# Altium PCB sensor_V1.1.PcbDoc
Units mil, origin at the board's own origin, x right, y up, seen from the top; angles counter-clockwise.
Board outline 1304.24 x 1068.02 mil, 2 copper layers (Top Layer, Bottom Layer); 67 components, 56 nets, 233 pads, 68 vias.
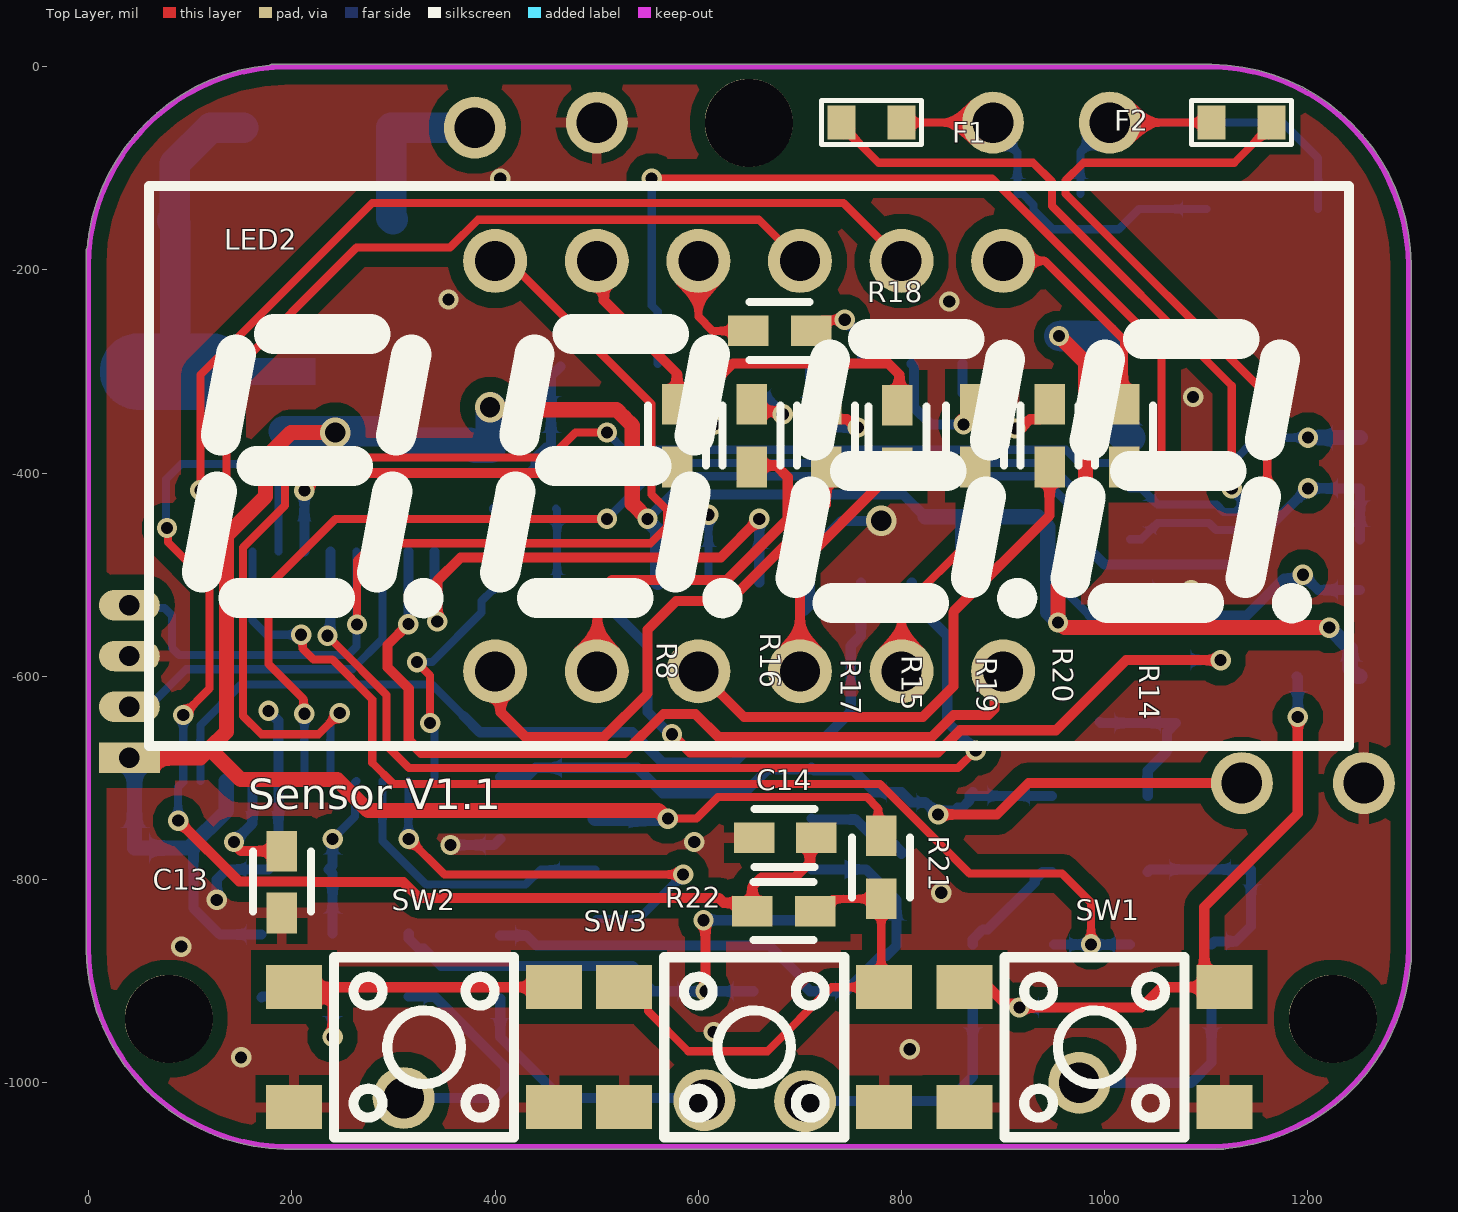
[diagram p0: Top Layer view]
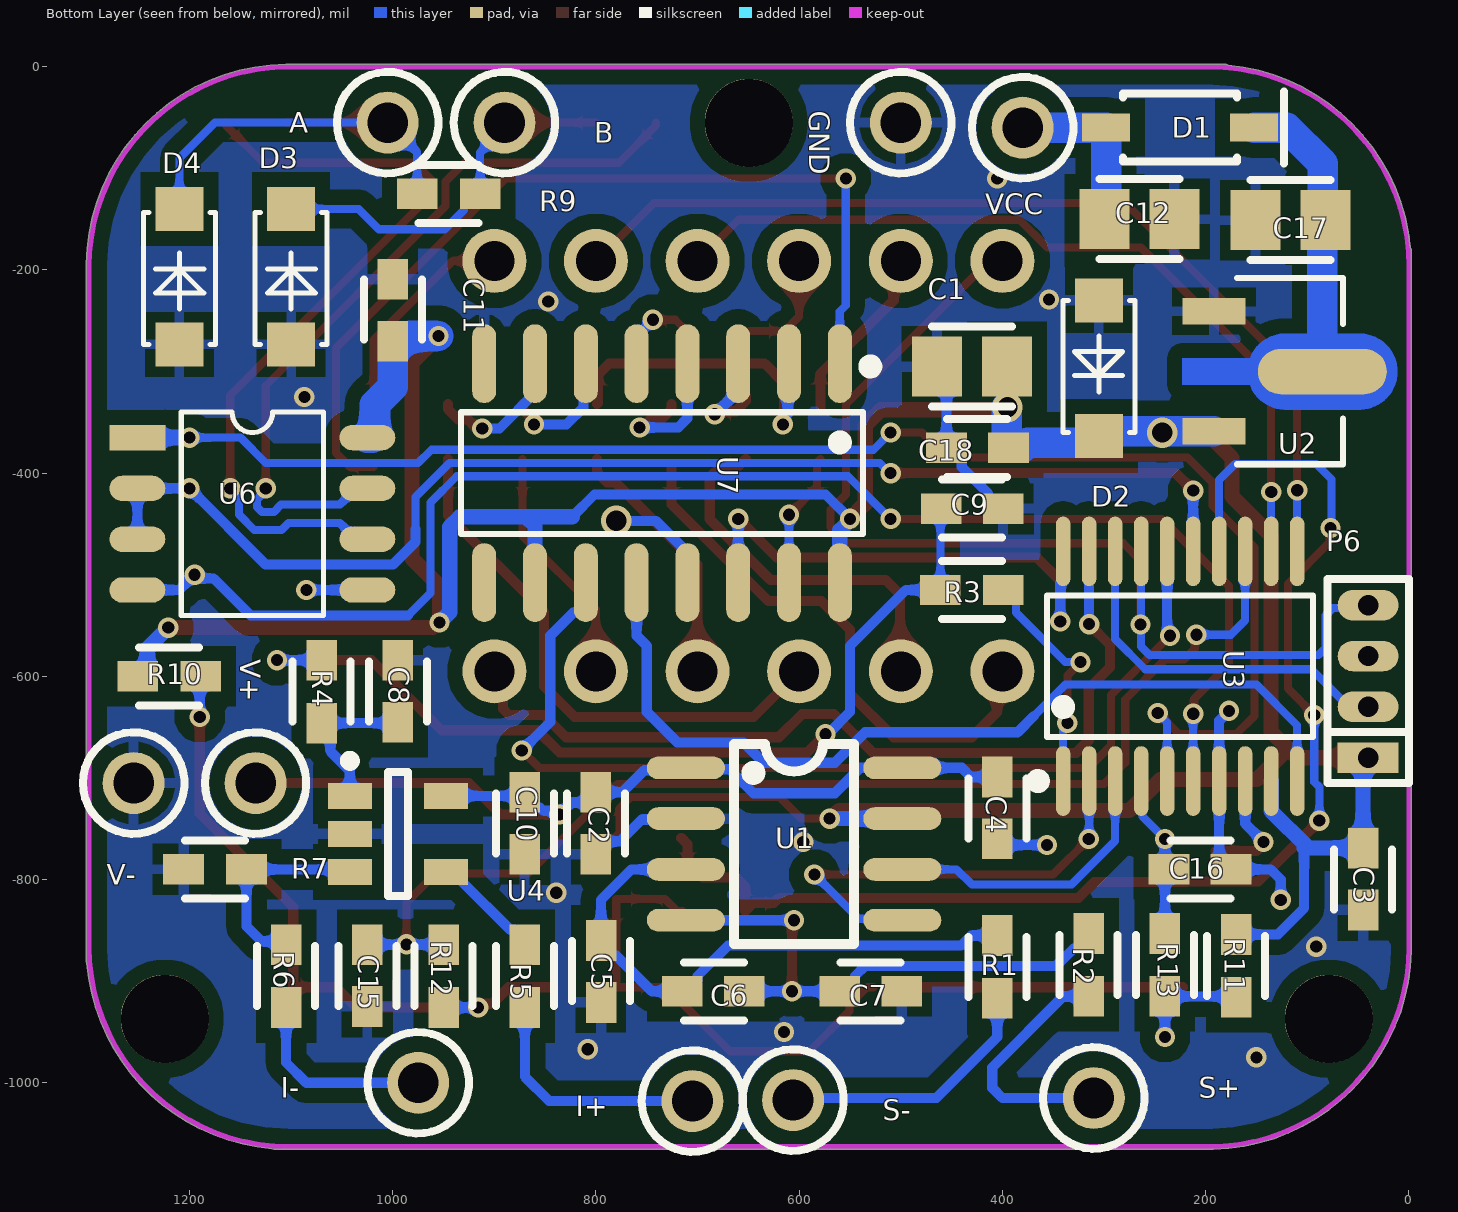
[diagram p1: Bottom Layer view, seen from below]
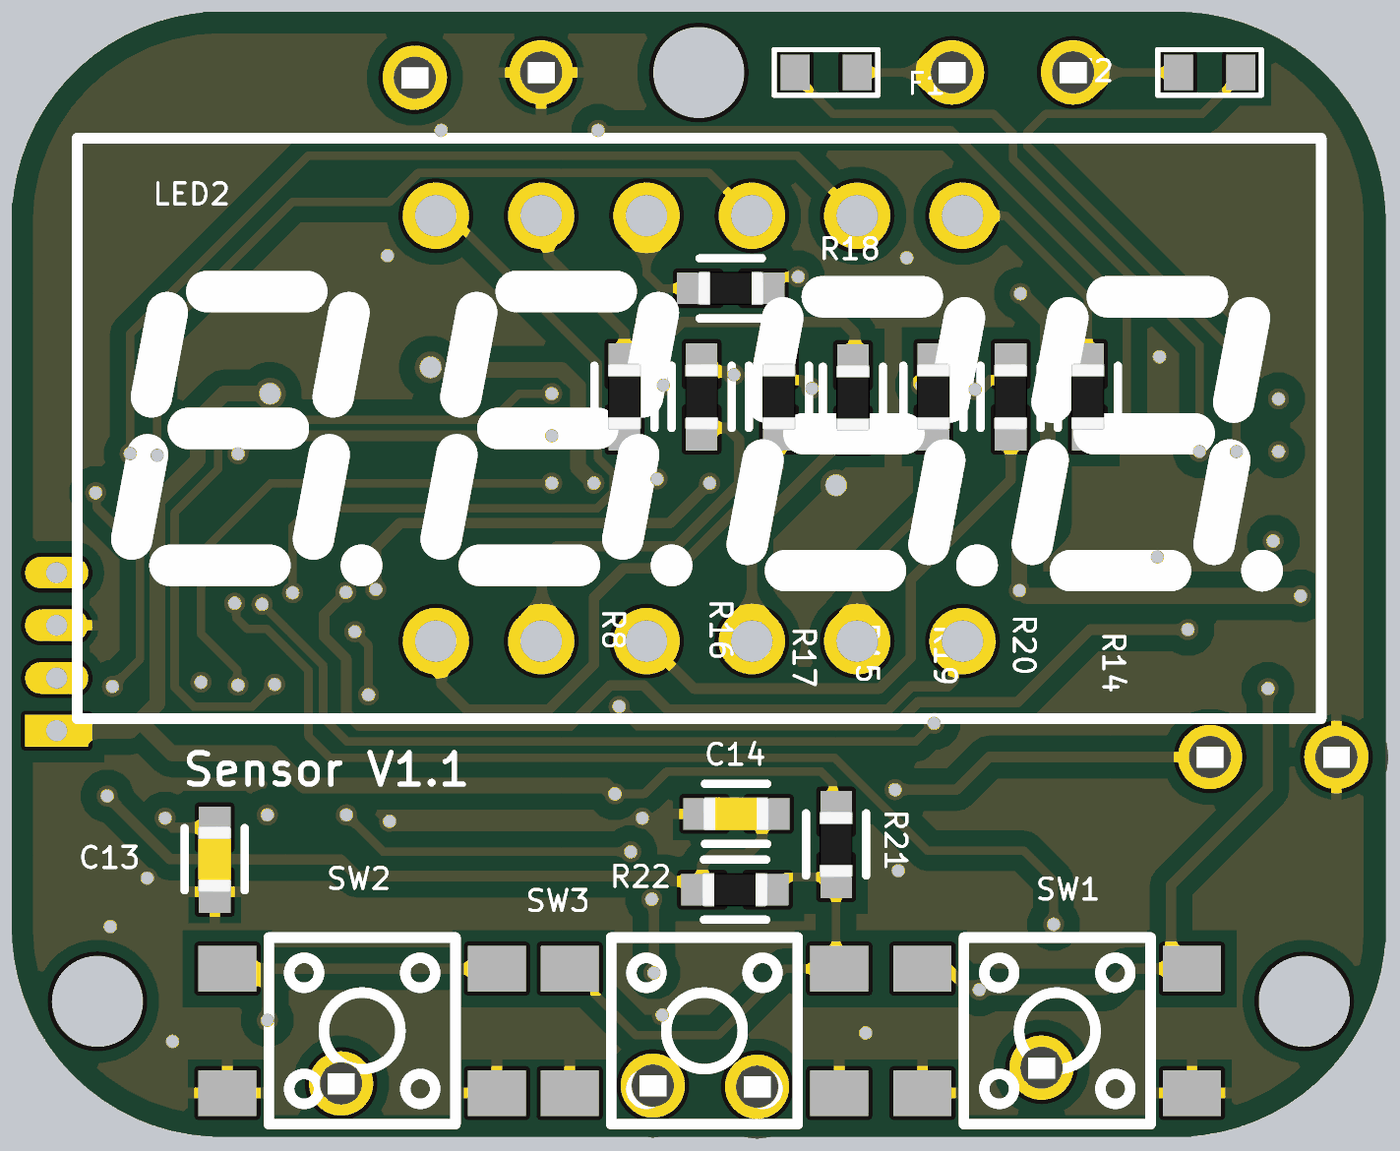
[diagram p2: 3D render of the assembled board from above, using the file's embedded part models]
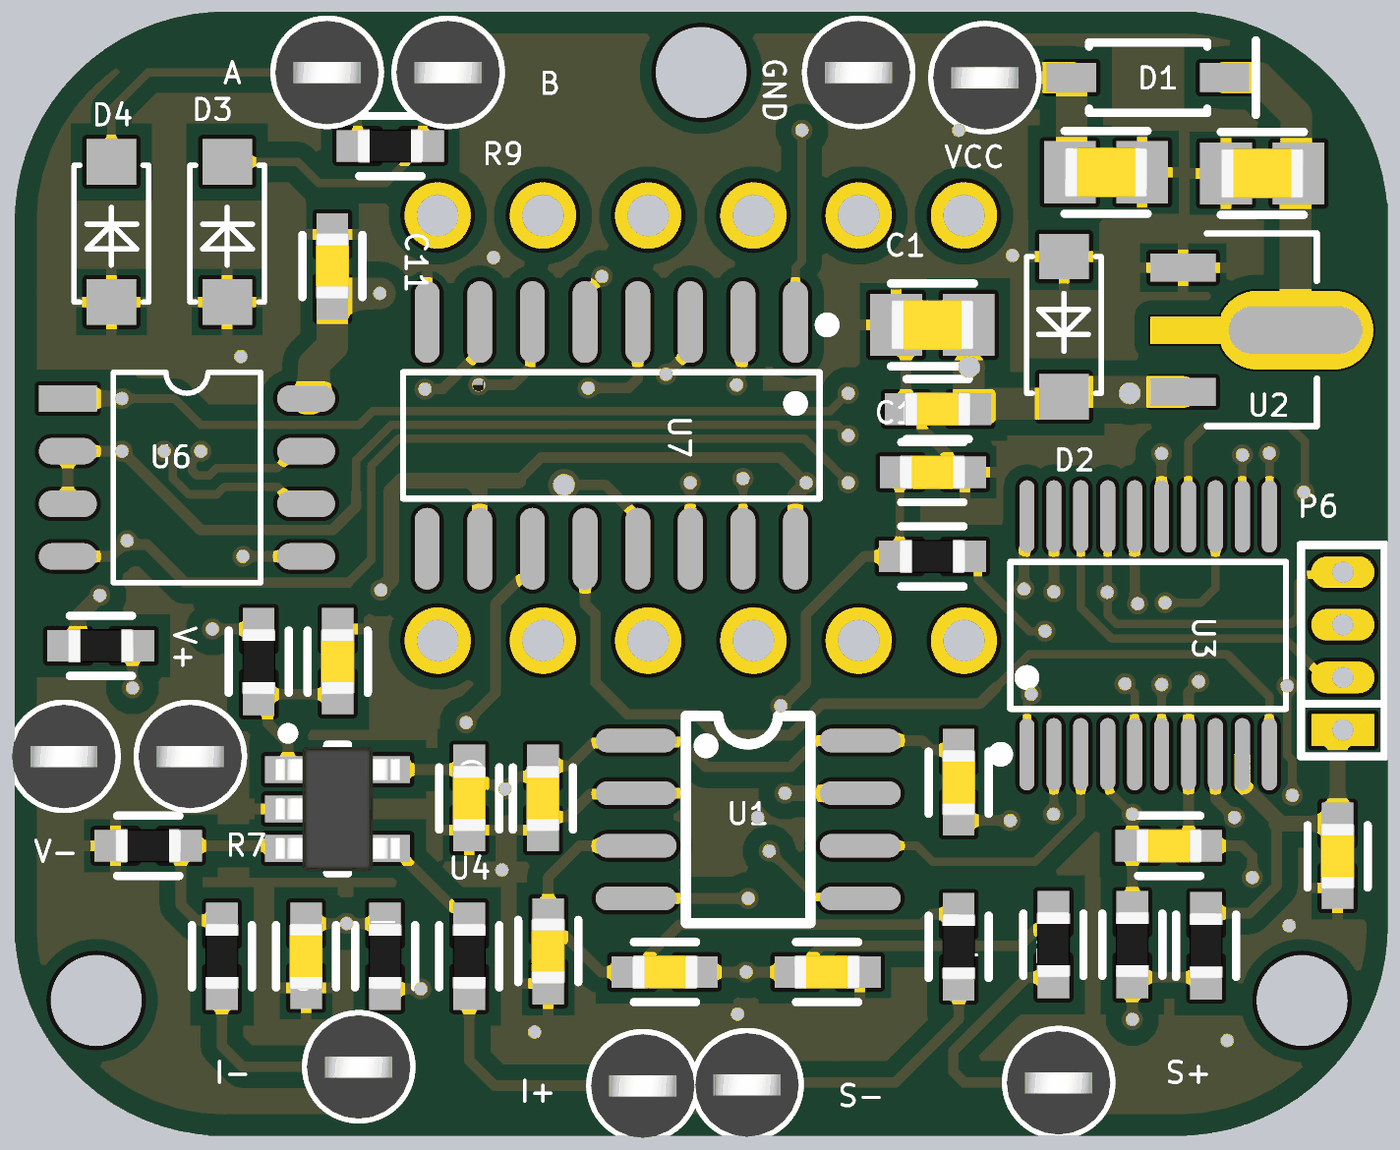
[diagram p3: 3D render of the assembled board from below, using the file's embedded part models]

## Layer stack, top to bottom
Top Solder: solder mask 0.4, Solder Resist, Dk 3.5
Top Layer: signal copper 1.4
Dielectric 1: dielectric 12.6, FR-4, Dk 4.8
Bottom Layer: signal copper 1.4
Bottom Solder: solder mask 0.4, Solder Resist, Dk 3.5

## Board outline
-2.52,-870 -2.52,-180 -1.63,-178.08 cw(c196.85,-196.85) 178.08,1.63 180,2.51 1105,2.51 1105.33,2.49 cw(c1102.36,-196.85) 1301.71,-193.88 1301.73,-194.21 1301.73,-880.79 1301.06,-882.5 cw(c1102.36,-866.14) 1118.72,-1064.84 1117.01,-1065.51 192.99,-1065.51 192.51,-1065.46 cw(c196.85,-866.14)

## Design rules (kind name [scope] priority, off if disabled: settings)
Clearance Clearance_1 [InPolygon] p1: gap=15 ignorepadtopadclearanceinfootprint=FALSE
Clearance [All] p2: gap=5 ignorepadtopadclearanceinfootprint=FALSE
DiffPairsRouting [All] p1: maxlimit=10 minlimit=8 mostfreqgap=10 toplayer_minwidth=8 toplayer_maxwidth=15 toplayer_prefwidth=8 bottomlayer_minwidth=8 bottomlayer_maxwidth=15 bottomlayer_prefwidth=8 maxuncoupledlength=500
PolygonConnect PolygonConnect_1 [isvia] p1: connectstyle=Direct reliefconductorwidth=10 reliefentries=4 polygonreliefangle="90 Angle" airgapwidth=10
PolygonConnect [All] p2: connectstyle=Relief reliefconductorwidth=10 reliefentries=4 polygonreliefangle="90 Angle" airgapwidth=10
RoutingVias [All] p1: holewidth=28 width=50 viastyle="Through Hole" minholewidth=28 minwidth=50 maxholewidth=28 maxwidth=50
SilkToSolderMaskClearance [IsPad] p1: minsilkscreentomaskgap=4 clearancetoexposedcopper=TRUE
SolderMaskExpansion [All] p1: expansion=4 istentingtop=FALSE
Width [All] p1: maxlimit=200 minlimit=5 preferedwidth=8
28 further rules are at their usual default settings.

## Classes and differential pairs
component class display: C18 LED2 R8 R14 R15 R16 R17 R18 R19 R20 U7
component class rs485: A B C11 D3 D4 F1 F2 R9 U6
component class mcu: C13 C14 C15 C16 P6 R10 R11 R12 R13 R21 R22 SW1 SW2 SW3 U3
component class constantCV: C1 C2 C3 C4 C5 C6 C7 C8 C9 C10 C12 C17 D1 D2 GND I+ I- R1 R2 R3 R4 R5 R6 R7 S+ S- U1 U2 U4 V+ V- VCC
differential pair 485: +485_P -485_N

## Components (designator, comment, footprint, x,y, rotation, side; value= is the part's Value field where it differs from the comment)
A "5001" KSTN-5001 1005,-55 r90 bottom
B "5001" KSTN-5001 890,-55 r90 bottom
C1 "Capacitor_0805" CAPC2012X127N_0805 430,-295 r0 bottom value=47u/10V
C2 "Capacitor_0603" CAPC1608X092N_0603 800,-745 r270 bottom value=0.1u
C3 "Capacitor_0603" CAPC1608X092N_0603 45,-800 r270 bottom value=0.1u
C4 "Capacitor_0603" CAPC1608X092N_0603 405,-730 r270 bottom value=0.1u
C5 "Capacitor_0603" CAPC1608X092N_0603 795,-890 r90 bottom value=0.1u
C6 "Capacitor_0603" CAPC1608X092N_0603 684.02,-910 r180 bottom value=0.1u
C7 "Capacitor_0603" CAPC1608X092N_0603 530,-910 r0 bottom value=0.1u
C8 "Capacitor_0603" CAPC1608X092N_0603 995,-615 r270 bottom value=0.1u
C9 "Capacitor_0603" CAPC1608X092N_0603 430,-435 r0 bottom value=0.1u
C10 "Capacitor_0603" CAPC1608X092N_0603 870,-745 r270 bottom value=0.1u
C11 "Capacitor_0603" CAPC1608X092N_0603 1000,-239.02 r90 bottom value=0.1u
C12 "22u/35V" CAPC2012X127N_0805 265,-150 r180 bottom
C13 "Capacitor_0603" CAPC1608X092N_0603 190,-802 r90 top value=470nF/50V
C14 "Capacitor_0603" CAPC1608X092N_0603 685,-759 r180 top value=0.1u
C15 "Capacitor_0603" CAPC1608X092N_0603 1025,-895 r270 bottom value=0.1u
C16 "Capacitor_0603" CAPC1608X092N_0603 205,-790 r180 bottom value=0.1u
C17 "22u/35V" CAPC2012X127N_0805 116.55,-151 r0 bottom
C18 "Capacitor_0603" CAPC1608X092N_0603 425,-375 r0 bottom value=0.1u
D1 "1N5819HW-7-F" DIOD-SOD-123-2_V 225,-60 r180 bottom
D2 "SMF5.0A" SOD123 305,-230 r270 bottom value=SMBJ6.5A
D3 "SMF6.5CA" SOD123 1100,-273.27 r90 bottom value=SMBJ6.5A
D4 "SMF6.5CA" SOD123 1210,-273.27 r90 bottom value=SMBJ6.5A
F1 "BSMD0603-010-33V" 0603R 800,-55 r180 top
F2 "BSMD0603-010-33V" 0603R 1105,-55 r0 top
GND "5001" KSTN-5001 500,-55 r90 bottom
I+ "5001" KSTN-5001 705,-1018 r90 bottom
I- "5001" KSTN-5001 975,-1000 r90 bottom
LED2 "FJ5461AH 红色" LED-SEG-TH_12P-L30.0-W14.0-P2.54-S10.26-BL 650,-393.03 r0 top locked
P6 "Header 4" 1.27-4P 40,-680 r90 bottom
R1 "1K/1%" RESC1608X055N_0603 405,-885.98 r270 bottom
R2 "1K/1%" RESC1608X055N_0603 315,-884.02 r270 bottom
R3 "1K/1%" RESC1608X055N_0603 430,-515 r180 bottom value=51K/1%
R4 "1K/1%" RESC1608X055N_0603 1070,-615 r90 bottom value=51K/1%
R5 "51/1%" RESC1608X055N_0603 870,-895 r90 bottom
R6 "51/1%" RESC1608X055N_0603 1105,-895 r270 bottom
R7 "1K/1%" RESC1608X055N_0603 1175,-790 r0 bottom
R8 "510" RESC1608X055N_0603 579,-363 r270 top
R9 "120" RESC1608X055N_0603 945,-125 r0 bottom
R10 "10K" RESC1608X055N_0603 1220,-600 r180 bottom
R11 "10K" RESC1608X055N_0603 170,-885 r270 bottom
R12 "1K/1%" RESC1608X055N_0603 950,-895 r90 bottom value=1K
R13 "1K/1%" RESC1608X055N_0603 240,-884.02 r90 bottom value=1K
R14 "510" RESC1608X055N_0603 1019,-363 r270 top
R15 "510" RESC1608X055N_0603 796,-364 r90 top
R16 "510" RESC1608X055N_0603 652.33,-363 r90 top
R17 "510" RESC1608X055N_0603 725.67,-363 r90 top
R18 "510" RESC1608X055N_0603 680,-260 r0 top
R19 "510" RESC1608X055N_0603 872.33,-363 r90 top
R20 "510" RESC1608X055N_0603 945.67,-363 r90 top
R21 "10K" RESC1608X055N_0603 780,-788 r270 top
R22 "1K/1%" RESC1608X055N_0603 684,-831 r180 top value=1K
S+ "5001" KSTN-5001 310,-1015 r90 bottom
S- "5001" KSTN-5001 606,-1017 r90 bottom
SW1 "KH-4.5X4.5X7H-STM" SW-SMD_4P-L4.5-W4.5-P3.00-LS6.8 990,-965 r180 top locked
SW2 "KH-4.5X4.5X7H-STM" SW-SMD_4P-L4.5-W4.5-P3.00-LS6.8 330,-965 r180 top locked
SW3 "KH-4.5X4.5X7H-STM" SW-SMD_4P-L4.5-W4.5-P3.00-LS6.8 655,-965 r180 top locked
U1 "CS1237-SOP8" SOIC-8_L5.0-W4.0-P1.27-LS6.0-BL 605,-765 r270 bottom
U2 "HT7550-1" SOT-89_L4.5-W2.5-P1.50-LS4.2-BR 138.4,-299.66 r0 bottom
U3 "CW32L010F8P6" TSSOP-20_L6.5-W4.4-P0.65-LS6.4-BL 225,-590 r180 bottom
U4 "RS321BK" SHBL-SOT-23-5_N 995,-755 r180 bottom
U6 "SIT3088" so-8 1251.38,-365 r180 bottom
U7 "74HC595D" SOIC-16_L9.9-W3.9-P1.27-LS6.0-BL 735,-400 r0 bottom
V+ "5001" KSTN-5001 1135,-705 r90 bottom
V- "5001" KSTN-5001 1255,-705 r90 bottom
VCC "5001" KSTN-5001 380,-60 r90 bottom

## Footprints (in the part's own frame and the unit in brackets; to place one, negate y for a bottom-side part, rotate by r counter-clockwise, add the part's x,y. Pads: shape width x height; smd on the part's side, far side on the other; paste and mask are expansions set on the pad)
1.27-4P [mil]
  rect 30x60 hole 20: 1(0,0)
  oval 30x60 hole 20: 2(50,0) 3(100,0) 4(150,0)
  silkscreen extent -25,-40 176,40
0603R [mm]
  rect 0.7x0.85 smd: 1(0,0) 2(1.5,0)
  silkscreen extent -0.5,-0.55 2,0.55
CAPC1608X092N_0603 [mil] "Chip Capacitor, 0603"
  round 10 on Mech3: 0(0,0)
  rect 40x30 smd: 1(-30.98,0) 2(30,0)
  silkscreen extent -30,-29 30,29, body extent -31,-16 31,16, height 36
CAPC2012X127N_0805 [mm] "Chip Capacitor, 0805"
  round 0.254 on Mech3: 0(0,0)
  rect 1.25x1.5 smd: 1(-0.875,0) 2(0.875,0)
  silkscreen extent -1,-1 1,1, body extent -1,-0.6 1,0.6, height 1.27
DIOD-SOD-123-2_V [mm] "SOD-123, 2-Leads, Body 2.85x1.7mm (max), Pitch 3.7mm"
  rect 1.2x0.7 smd: 1(-1.85,0) 2(1.85,0)
  silkscreen extent -1.43,-0.9 2.6,0.9, body extent -1.42,-0.85 1.43,0.85, height 1.45
KSTN-5001 [mm] "Test Point, Through Hole, Dia 2.54mm"
  round 1.55 hole 1.016: 1(0,0)
  silkscreen extent -1.27,-1.27 1.27,1.27, body extent -1.25,-1.24 1.25,1.24, height 4.62
LED-SEG-TH_12P-L30.0-W14.0-P2.54-S10.26-BL [mm]
  round 1.6 hole 1: 1(-6.35,-5.13) 2(-3.81,-5.13) 3(-1.27,-5.13) 4(1.27,-5.13) 5(3.81,-5.13) 6(6.35,-5.13) 7(6.35,5.13) 8(3.81,5.13) 9(1.27,5.13) 10(-1.27,5.13) 11(-3.81,5.13) 12(-6.35,5.13)
  silkscreen extent -15,-7 15,7
RESC1608X055N_0603 [mil] "Chip Resistor, 0603"
  round 10 on Mech3: 0(0,0)
  rect 40x30 smd: 1(-30.98,0) 2(30.98,0)
  silkscreen extent -30,-29 30,29, body extent -31,-16 31,16, height 22
SHBL-SOT-23-5_N [mm] "SOT23, 5-Leads, Body 2.9x1.6mm, Pitch 0.95mm, Lead Span 2.8mm, IPC Medium Density"
  rect 1.1x0.65 smd: 1(-1.2,0.95) 2(-1.2,0) 3(-1.2,-0.95) 4(1.2,-0.95) 5(1.2,0.95)
  silkscreen extent -1.33,-1.55 0.25,1.95, body extent -1.5,-1.5 1.5,1.5, height 1.45
so-8 [mil]
  rect 55x25 smd: 1(0,0)
  oval 55x25 smd: 2(0,-50) 3(0,-100) 4(0,-150) 5(226.38,-150) 6(226.38,-100) 7(226.38,-50) 8(226.38,0)
  silkscreen extent 43,-175 183,25
SOD123 [mm]
  rect 1.1x1.2 smd: 1(0,0) 2(3.385,0)
  silkscreen extent 0,-0.9 3.3,0.9
SOIC-8_L5.0-W4.0-P1.27-LS6.0-BL [mil]
  oval 22.38x76.78 smd: 1(-75,-106.5) 2(-25,-106.5) 3(25,-106.5) 4(75,-106.5) 5(75,106.5) 6(25,106.5) 7(-25,106.5) 8(-75,106.5)
  silkscreen extent -98,-59 98,59
SOIC-16_L9.9-W3.9-P1.27-LS6.0-BL [mil]
  oval 23.7x77.6 smd: 1(-175,-107.7) 2(-125,-107.7) 3(-75,-107.7) 4(-25,-107.7) 5(25,-107.7) 6(75,-107.7) 7(125,-107.7) 8(175,-107.7) 9(175,107.7) 10(125,107.7) 11(75,107.7) 12(25,107.7) 13(-25,107.7) 14(-75,107.7) 15(-125,107.7) 16(-175,107.7)
  silkscreen extent -211,-111 198,60
SOT-89_L4.5-W2.5-P1.50-LS4.2-BR [mm]
  rect 1.575x0.672 smd: 1(1.356,-1.5) 3(1.356,1.5)
  oval 3.226x1.14 smd: 2(-1.356,0.009)
  Top Layer region: -2.283,0.959 -0.429,0.959 -0.385,0.958 -0.34,0.955 -0.296,0.949 -0.252,0.942 -0.208,0.933 -0.165,0.921 -0.123,0.908 -0.081,0.893 -0.04,0.875 0,0.856 0.04,0.835 0.078,0.812 0.115,0.788 0.151,0.761 0.185,0.733 0.219,0.704 0.251,0.673 0.281,0.64 0.31,0.606 0.337,0.571 0.362,0.534 0.386,0.497 0.408,0.458 0.428,0.418 0.447,0.339 2.144,0.339 2.144,-0.321 0.447,-0.321 0.428,-0.401 0.408,-0.44 0.386,-0.479 0.362,-0.517 0.337,-0.553 0.31,-0.588 0.281,-0.622 0.251,-0.655 0.219,-0.686 0.185,-0.716 0.151,-0.744 0.115,-0.77 0.078,-0.795 0.04,-0.818 0,-0.839 -0.04,-0.858 -0.081,-0.875 -0.123,-0.89 -0.165,-0.904 -0.208,-0.915 -0.252,-0.925 -0.296,-0.932 -0.34,-0.937 -0.385,-0.94 -0.429,-0.941 -2.283,-0.941 -2.328,-0.94 -2.372,-0.937 -2.416,-0.932 -2.46,-0.925 -2.504,-0.915 -2.547,-0.904 -2.589,-0.89 -2.631,-0.875 -2.672,-0.858 -2.713,-0.839 -2.752,-0.818 -2.79,-0.795 -2.827,-0.77 -2.863,-0.744 -2.898,-0.716 -2.931,-0.686 -2.963,-0.655 -2.993,-0.622 -3.022,-0.588 -3.049,-0.553 -3.075,-0.517 -3.098,-0.479 -3.12,-0.44 -3.141,-0.401 -3.159,-0.36 -3.175,-0.318 -3.189,-0.276 -3.202,-0.233 -3.212,-0.19 -3.22,-0.146 -3.227,-0.102 -3.231,-0.058 -3.233,-0.013 -3.233,0.031 -3.231,0.076 -3.227,0.12 -3.22,0.164 -3.212,0.208 -3.202,0.251 -3.189,0.294 -3.175,0.336 -3.159,0.377 -3.141,0.418 -3.12,0.458 -3.098,0.497 -3.075,0.534 -3.049,0.571 -3.022,0.606 -2.993,0.64 -2.963,0.673 -2.931,0.704 -2.898,0.733 -2.863,0.761 -2.827,0.788 -2.79,0.812 -2.752,0.835 -2.713,0.856 -2.672,0.875 -2.631,0.893 -2.589,0.908 -2.547,0.921 -2.504,0.933 -2.46,0.942 -2.416,0.949 -2.372,0.955 -2.328,0.958 -2.283,0.959
  silkscreen extent -1.87,-2.33 0.78,2.33
SW-SMD_4P-L4.5-W4.5-P3.00-LS6.8 [mm]
  rect 1.4x1.1 smd: 1(-3.25,1.5) 2(3.25,1.5) 3(-3.25,-1.5) 4(3.25,-1.5)
  silkscreen extent -2.25,-2.25 2.25,2.25
TSSOP-20_L6.5-W4.4-P0.65-LS6.4-BL [mil]
  oval 14.33x68.58 smd: 1(-115.16,-113.03) 2(-89.57,-113.03) 3(-63.98,-113.03) 4(-38.39,-113.03) 5(-12.79,-113.03) 6(12.8,-113.03) 7(38.39,-113.03) 8(63.98,-113.03) 9(89.57,-113.03) 10(115.16,-113.03) 11(115.16,113.03) 12(89.57,113.03) 13(63.98,113.03) 14(38.39,113.03) 15(12.8,113.03) 16(-12.79,113.03) 17(-38.39,113.03) 18(-63.98,113.03) 19(-89.57,113.03) 20(-115.16,113.03)
  silkscreen extent -146,-119 131,70

## Part data
A B GND I+ I- S+ S- V+ V- VCC: "Test Point, Black, 1-Pin THD, RoHS, Bulk", Manufacturer=Keystone
C1: "Capacitor, MLCC", Manufacturer=KEMET, Package=0805, PartNumber=C0805C106K8PACTU, TempCo=[tempco], Tolerance=[tol], Voltage Rating=[voltage], ComponentLink1Description=Datasheet, SupplierDescription="CAP CER 10UF 10V X5R 0805"
C2 C3 C4 C5 C6 C7 C8 C9 C10 C11 C13 C14 C15 C16 C18: "Capacitor, MLCC", Manufacturer=KEMET, Package=0603, PartNumber=C0603C104M5RACTU, TempCo=[tempco], Tolerance=[tol], Voltage Rating=[voltage], ComponentLink1Description=Datasheet, SupplierDescription="CAP CER 0.1UF 50V X7R 0603"
C12 C17: library part Capacitor_0805, "Capacitor, MLCC", Manufacturer=KEMET, Package=0805, PartNumber=C0805C106K8PACTU, TempCo=[tempco], Tolerance=[tol], Voltage Rating=[voltage], ComponentLink1Description=Datasheet, SupplierDescription="CAP CER 10UF 10V X5R 0805"
D1: Maximum Reverse Current IR (uA)=50, Operating and Storage Temperature Range="-65 to 125 degC", Peak Forward Surge Current IFSM (A)=25, Peak Repetitive Reverse Voltage VRRM (V)=40, Mounting Technology="Surface Mount", PackageDescription="2-Pin SOD-123, Body 2.7 x 1.55 mm, Pitch 3.7 mm", PackageReference=SOD-123-2, Packing="Tape and Reel", PartNumber=1N5819HW-7-F, RoHS=TRUE, Total Capacitance CT (pF)=50, VR (RMS) (V)=28
D2 D3 D4: library part "DIODE S"
F1 F2: library part RES2
LED2: JLCPCB Part Class="Extended Part", LCSC Part Name="4位0.56英寸红色数码管 共阴极", Luminous Color=红色, Manufacturer=志浩, Power Dissipation=-, Add into BOM=yes, Convert to PCB=yes, Datasheet=https://atta.szlcsc.com/upload/public/pdf/source/20151111/1457707576636.pdf, Device="FJ5461AH 红色", Digit/Alpha Size(inch)=0.56, Display Type=7段, LED Polarity=共阴极, Manufacturer Part="FJ5461AH 红色", Module Size=-, Number of Characters=4位, Supplier=LCSC, Supplier Footprint=插件, Supplier Part=C54396, Symbol="FJ5461AH red"
R1 R2 R3 R4 R5 R6 R7 R8 R9 R10 R11 R12 R13 R14 R15 R16 R17 R18 R19 R20 R21 R22: library part Resistor_0603, "Resistor, Standard", Manufacturer=Yageo, Package=0603, PartNumber=RC0603FR-1075KL, Power Rating=[power], TempCo=[tempco], Tolerance=tol, ComponentLink1Description=Datasheet, SupplierDescription="RES SMD 75K OHM 1% 1/10W 0603"
SW1 SW2 SW3: library part J1L0503110, "Tactile Switch, 6 × 6 mm, Height 5.0mm, 4-Pin THD", Max Operating Temperature="70 degC", Min Operating Temperature="-25 degC", PartNumber=J1L0503110
U1: JLCPCB Part Class="Extended Part", LCSC Part Name="1通道 24位ADC SPI接口", Manufacturer=CHIPSEA(芯海科技), Add into BOM=yes, Convert to PCB=yes, Datasheet=https://atta.szlcsc.com/upload/public/pdf/source/20160706/1467801115662.pdf, Device=CS1237-SOP8, Manufacturer Part=CS1237-SOP8, Supplier=LCSC, Supplier Footprint=SOP-8-150mil, Supplier Part=C77801, Symbol=CS1237-SO
U2: library part HT7550-1_C347189, Dropout Voltage=100mV@(1mA), JLCPCB Part Class="Extended Part", LCSC Part Name="输入30V 输出5V 100mA", Manufacturer=UMW(友台半导体), Maximum Input Voltage=30V, Operating Temperature=-25℃~+70℃, Output Current=100mA, Output Voltage=5V, Power Supply Rejection Ratio (PSRR)=-, standby current=3uA, Add into BOM=yes, Convert to PCB=yes, Datasheet=https://atta.szlcsc.com/upload/public/pdf/source/20241210/442D8F583BE08BBCCA568BF38D964031.pdf, Device=HT7550-1_C347189, Manufacturer Part=HT7550-1, Noise=-, Number of Outputs=1, Output Polarity=正极, Output Type=固定, Supplier=LCSC, Supplier Footprint=SOT-89, Supplier Part=C347189, Symbol=HT7550-1_C347189
U3: LCSC Part Name=单片机（超低功耗MCU）CW32L010F8P6, Low-Voltage Detect=有, Manufacturer=CW(芯源), Operating Temperature Range=-40℃~+85℃, Operating Voltage Range=1.62V~5.5V, 16Bit Timer=6, 32Bit Timer=1, ADC (Bit)=12bit, Add into BOM=yes, CCP Capture/Compare=有, Convert to PCB=yes, CPU Core="ARM Cortex-M0+", CPU Maximum Speed=48MHz, Datasheet=https://atta.szlcsc.com/upload/public/pdf/source/20241016/B2F7E6511F33DFEE1FF291443365E705.pdf, Device=CW32L010F8P6, EEPROM=-, I2C=1, Infrared Data Association=有, Internal Comparator=2, Internal Oscillator=有, Manufacturer Part=CW32L010F8P6, Program Memory Type=FLASH, Program Storage Size=64KB, PWM (Bit)=16bit, RAM Size=4KB, Real-Time Clock=有, SPI=1, Supplier=LCSC, Supplier Footprint=TSSOP-20, Supplier Part=C41425332, Symbol=CW32L010F8P6, UART/USART=2, Watchdog=有
U4: library part BL321LFR, "1 MHz Rail-to-Rail IO Operational Amplifier, Single Channel, -40 to 125 degC, 5-Pin SOT23, RoHS, Tape and Reel", Manufacturer="Shanghai Belling", Operating Temperature Range(C)="-40 to 150", Package Description="5-Pin Small Outline Transistor, Body 1.6 x 2.9 mm, Pitch 0.95 mm", Package Reference=SOT23-5, PartNumber=BL321LFR, Publisher="Bolgen Studio"
U6: library part SN65HVD06D
U7: library part 74HC595
P6: Publisher="Altium Limited"

## Free pads (board coordinates)
  round 86.61 hole 86.61 unplated: 0(78.74,-937.01) 0(649.61,-55.12) 0(1224.41,-937.01)

## Via types
v1: diameter 20, hole 12, Top Layer to Bottom Layer, tented both sides, 65 vias
v2: diameter 30, hole 20, Top Layer to Bottom Layer, tented both sides, 3 vias

## Nets (pads, with @x,y where several pads share a name; then routed paths per layer and width w, separated by ;. In a path a pad name is that pad's centre, name@x,y a point inside that pad or via, vN(x,y) a via of type N, cw(c..) or ccw(c..) an arc to the next point about the centre after c; other vN are vias at no path point)
485_N: F1.2 U6.7 | length 750
  Top Layer w8: F1.2 740.94,-57.95 777.5,-94.51 929.51,-94.51 948.02,-113.02 948.02,-136.98 1125,-313.96 v1(1125,-415)
  Bottom Layer w8: U6.7 1036.02,-415 1052.02,-431 1109.89,-431 1116.94,-438.06 1128.81,-438.06 1133.5,-433.37 1133.5,-425.69 1125,-417.19 v1(1125,-415)
485_P: F2.2 U6.6 | length 784.8
  Top Layer w8: v1(1160,-415) 1160,-323.5 961.5,-125 961.5,-112.1 979.09,-94.51 1127.5,-94.51 1164.06,-57.95 F2.2
  Bottom Layer w8: U6.6 1036.02,-465 1052.02,-449 1102.43,-449 1109.49,-456.06 1136.27,-456.06 1151.5,-440.83 1151.5,-425.69 1160,-417.19 v1(1160,-415)
4856_N: B.1 D3.2 F1.1 R9.1 | length 381.6
  Top Layer w8: F1.1 B.1
  Bottom Layer w8: B.1 890,-60.46 914.02,-84.48 R9.1 919.02,-125 930.02,-136 930.02,-141 949.02,-160 1013.52,-160 1033.52,-140 D3.2
4856_P: A.1 D4.2 F2.1 R9.2 | length 451.5
  Top Layer w8: A.1 F2.1
  Bottom Layer w8: R9.2 975.98,-84.02 A.1 1175,-55 1210,-90 D4.2
Curr_V: R3.2 U3.1 | length 236.2
  Top Layer w8: v1(323,-586) 336,-599 v1(336,-646)
  Bottom Layer w8: v1(323,-586) 323.06,-585.94 338.06,-585.94 386.69,-537.31 386.69,-526 397.69,-515 R3.2 ; v1(336,-646) 340.16,-650.16 U3.1
diag1: LED2.12 P6.4 U3.17 | length 1080.7
  Top Layer w8: v1(264,-549) 264,-486 281,-469 552.87,-469 569,-452.87 569,-436 554,-421 554,-332 413.05,-191.05 LED2.12
  Bottom Layer w8: P6.4 42.59,-532.59 74.59,-532.59 82,-540 82,-572 89,-579 255,-579 263.39,-570.61 U3.17
diag2: LED2.9 U3.12 | length 816.6
  Top Layer w8: v1(135.43,-418.57) 135.43,-306.19 263.56,-178.05 355.73,-178.05 383.23,-150.56 659.51,-150.56 LED2.9
  Bottom Layer w8: U3.12 v1(135.43,-418.57)
diag3: LED2.8 U3.11 | length 957.7
  Top Layer w8: v1(109.84,-416.84) 109.84,-303.16 279,-134 742.95,-134 LED2.8
  Bottom Layer w8: U3.11 v1(109.84,-416.84)
diag4: LED2.6 U3.19 | length 862.4
  Top Layer w10: v1(314.57,-548.57) 294,-569.14 294,-591 315,-612 315,-663 327.32,-675.32 527.39,-675.32 565.72,-637 597,-637 620,-660 829.43,-660 851.43,-638 885.53,-638 891.39,-632.14 891.39,-603.61 LED2.6
  Bottom Layer w10: v1(314.57,-548.57) U3.19
DOUT: U1.6 U3.3 | length 292.5
  Bottom Layer w8: U3.3 288.98,-761.98 332,-805 430,-805 445,-790 U1.6
EN: U3.15 U6.2 U6.3 | length 1258.5
  Top Layer w10: v1(212.2,-417.2) 229.4,-400 v1(510,-400)
  Bottom Layer w8: v1(510,-400) 510.69,-400 520.69,-390 944,-390 977.5,-423.5 977.5,-455
  Bottom Layer w10: U3.15 v1(212.2,-417.2) ; 977.5,-455 977.5,-467.5 1000,-490 1125,-490 v1(1200,-415) U6.2 U6.3
GND: C1.2 C2.2 C3.2 C4.2 C5.1 C7.1 C8.1 C9.1 C10.2 C11.2 C12.2 C13.1 C14.2 C15.2 C16.2 C17.2 C18.2 D2.1 D3.1 D4.1 GND.1 P6.3 R7.2 SW1.1 SW1.2 SW2.1 SW2.2 SW3.1 SW3.2 U1.2 U2.1 U3.7 U4.2 U6.5 U7.8 U7.13 V-.1 | length 771.1
  Bottom Layer w10: v1(126,-820) 126,-800 136,-790 C16.2 176.61,-790 186.61,-780 U3.7 186.61,-643.61 v1(177,-634) ; v1(356,-766) 399,-766 C4.2 ; C9.1 404.02,-435 414.02,-425 414.02,-420 440,-394.02 440,-385 450,-375 C18.2 455,-304.45 C1.2 ; U7.13@703.67,-535.81 710,-529.48 U7.13 710,-478 741,-447 v2(780,-447) ; U1.2 712.37,-740.87 754.87,-740.87 776.39,-762.39 790,-762.39 800,-772.39 C2.2 ; U6.5 v1(1085,-515)
  other v1: 150,-975 808,-967 615,-950 91,-866 839,-813 596,-763 1087,-325 847,-231 354,-229 405,-110
I+: I+.1 R5.1 | length 243
  Bottom Layer w10: I+.1 846,-1018 870,-994 R5.1
I-: I-.1 R6.2 | length 192.3
  Bottom Layer w10: I-.1 1085,-1000 1105,-980 R6.2
IN_RCK: U3.10 U7.12 | length 895.7
  Bottom Layer w8: U3.10 109.84,-648.16 150,-608 338,-608 369,-639
  Bottom Layer w10: 369,-639 385,-655 535,-655 565,-685 635,-685 655,-665 720,-665 750,-635 750,-570 760,-560 U7.12
IN_SCK: U3.16 U7.11 | length 1006.4
  Top Layer w8: v1(235,-560) 268.5,-593.5 268.5,-593.86 293,-618.36 293,-668 315.32,-690.32 855.68,-690.32 v1(873,-673)
  Bottom Layer w10: v1(235,-560) 237.79,-557.21 U3.16 ; U7.11 810,-530.94 822.27,-537.27 845,-560 845,-645 v1(873,-673)
IN_SI: U3.20 U7.14 | length 515.2
  Top Layer w10: v1(343,-546) 343,-506 366,-483 622,-483 v1(660,-445)
  Bottom Layer w10: U3.20 340.16,-505.27 343,-508.11 v1(343,-546) ; U7.14 v1(660,-445)
LED_1: LED2.11 R8.1 | length 176.7
  Top Layer w10: LED2.11 506.91,-197.96 506.91,-229.91 579,-302 R8.1@579,-335.02
LED_2: LED2.7 R14.1 | length 226
  Top Layer w8: LED2.7@891.72,-182.77 LED2.7 941.05,-191.05 1019,-269 R14.1
LED_3: LED2.4 R15.1 | length 254.7
  Top Layer w10: LED2.4 700,-490 781.02,-408.98 789,-408.98 799,-398.98 799,-393.98 R15.1@799,-385.98
LED_4: LED2.2 R16.1 | length 378.4
  Top Layer w10: LED2.2 500.64,-594.36 500.64,-519.36 515,-505 628.28,-505 688,-445.28 688,-404 676.48,-392.48 658.82,-392.48 R16.1@652.33,-385.98
LED_5: LED2.1 R17.1 | length 541.6
  Top Layer w10: LED2.1 405.38,-600.38 405.38,-635.38 430,-660 507,-660 550,-617 550,-554 578,-526 630.21,-526 725.67,-430.55 R17.1
LED_6: LED2.10 R18.1 | length 109.8
  Top Layer w8: LED2.10 600,-246 614,-260 R18.1
LED_7: LED2.5 R19.1 | length 239
  Top Layer w8: LED2.5 800,-534 872.33,-461.67 R19.1@872.33,-385.98
LED_8: LED2.3 R20.1 | length 545.3
  Top Layer w10: LED2.3 645,-640 821,-640 851,-610 851,-536.5 945.67,-441.84 R20.1@945.67,-385.98
NetC5_2: C5.2 C6.1 R1.1 U1.3 | length 575.3
  Bottom Layer w10: R1.1 430.67,-855 440.67,-865 670,-865 700,-895 700,-900 710,-910 C6.1 745,-910 780,-875 785,-875 795,-865 C5.2 795,-820 765,-790 U1.3
NetC6_2: C6.2 C7.2 R2.1 U1.4 | length 545.8
  Top Layer w10: v1(605,-840) 607.01,-842.01 v1(607.01,-910)
  Bottom Layer w10: R2.1 315,-858.03 325,-868.03 330,-868.03 346.97,-885 535,-885 545,-895 545,-900 555,-910 C7.2 v1(607.01,-910) C6.2 ; v1(605,-840) U1.4
NetC8_2: C8.2 R4.1 U4.1 | length 158.5
  Bottom Layer w10: C8.2 995.98,-645.98 R4.1 1061.4,-654.58 1061.4,-673.6 1042.24,-692.76 U4.1
NetC9_2: C9.2 R3.1 R4.2 | length 919.5
  Top Layer w10: v1(574,-657) 592,-675 835.64,-675 857.64,-653 952,-653 1020.98,-584.02 v1(1114.02,-584.02)
  Bottom Layer w8: C9.2 460.98,-435.98 R3.1
  Bottom Layer w10: R3.1 495,-515 550,-570 550,-635 572,-657 v1(574,-657) ; R4.2 v1(1114.02,-584.02)
NetC13_2: C13.2 U3.8 | length 118.7
  Top Layer w10: v1@142,-764 150,-772 C13.2
  Bottom Layer w10: v1(143,-763) 161.02,-744.98 U3.8
NetC17_1: C17.1 D1.2 U2.2 | length 289.1
  Bottom Layer w30: U2.2 85,-153.9 C17.1 84.44,-148.66 84.44,-95.56 120,-60 D1.2
NetR5_2: R5.2 U4.4 | length 111.9
  Bottom Layer w10: R5.2 870,-859.02 880,-849.02 885,-849.02 931.1,-802.91 931.1,-800.2 938.9,-792.4 U4.4
NetR6_1: R6.1 R7.1 U4.3 | length 205.2
  Bottom Layer w10: U4.3 1044.65,-790 R7.1 1144.02,-845.98 1129.14,-860.86 1108.16,-860.86 R6.1
NetR8_2: R8.2 U7.15 | length 134.6
  Top Layer w8: R8.2@579,-385.98 582.3,-389.28 582.3,-413.3 v1(610,-441)
  Bottom Layer w8: U7.15 v1(610,-441)
NetR10_2: R10.2 R12.1 SW1.3 SW1.4 | length 651
  Top Layer w10: SW1.4@842.05,-905.94 885.94,-905.94 902.16,-922.16 912.16,-922.16 v1(915.98,-925.98) 1035.96,-925.98 1056,-905.94 1097.95,-905.94 1097.95,-827.05 1190,-735 v1(1190,-640)
  Bottom Layer w10: v1(915.98,-925.98) R12.1 ; R10.2 1190,-600.98 v1(1190,-640)
NetR11_2: R11.2 R13.1 SW2.3 SW2.4 | length 422.3
  Top Layer w10: SW2.4@222.05,-905.94 SW2.4@223.35,-905.94 ; v1(240,-955) 240,-922.6 SW2.4@223.35,-905.94 ; SW2.3@477.95,-905.94 SW2.4@223.35,-905.94
  Bottom Layer w10: R11.2 170.98,-915 R13.1 v1(240,-955)
NetR14_2: R14.2 U7.1 | length 901.8
  Top Layer w8: v1(554,-110) 889,-110 1056,-277 1056,-380 1042.02,-393.98 R14.2
  Bottom Layer w8: v1(554,-110) 554.12,-110.12 554.12,-235.12 560,-241 U7.1
NetR15_2: R15.2 U7.2 | length 328.5
  Top Layer w10: v1(616,-352) 615,-351 615,-311 634,-292 787,-292 797.87,-302.87 797.87,-330.89 R15.2@799,-332.02
  Bottom Layer w10: U7.2 611.08,-293.38 611.08,-341.67 616,-346.59 v1(616,-352)
NetR16_2: R16.2 U7.3 | length 73.6
  Top Layer w10: R16.2@652.33,-324.02 652.33,-329.02 662.33,-339.02 680.02,-339.02 v1(683,-342)
  Bottom Layer w10: U7.3@660,-319 v1(683,-342)
NetR17_2: R17.2 U7.4 | length 148.2
  Top Layer w10: R17.2 725.67,-337.02 735.67,-347.02 746.31,-347.02 754.29,-355 v1(757,-355)
  Bottom Layer w10: U7.4 710,-346 719,-355 v1(757,-355)
NetR18_2: R18.2 U7.5 | length 87.5
  Top Layer w8: R18.2 721.98,-249 v1(744,-249)
  Bottom Layer w8: v1(744,-249) 744,-249.18 760,-265.18 U7.5
NetR19_2: R19.2 U7.6 | length 130.9
  Top Layer w10: R19.2@857.33,-348.33 858.65,-347.02 R19.2@861,-347.02 ; v1(861,-352) R19.2@861,-347.02 ; R19.2@861,-345.33 R19.2@861,-347.02 ; R19.2 872.33,-337.02 862.33,-347.02 R19.2@861,-347.02
  Bottom Layer w10: U7.6 812.11,-294.41 812.11,-335.11 829,-352 v1(861,-352)
NetR20_2: R20.2 U7.7 | length 141.7
  Top Layer w10: v1(912,-356) 917.41,-356 926.4,-347.02 935.67,-347.02 945.67,-337.02 R20.2
  Bottom Layer w10: U7.7 860,-321 895,-356 v1(912,-356)
NetR21_2: R21.2 R22.1 SW3.3 SW3.4 | length 469.8
  Top Layer w8: SW3.4 532.96,-905.94 550.61,-923.6 550.61,-929.5 590.1,-969 668,-969 731.06,-905.94 SW3.3 780,-902.99 R21.2 732,-818.98 719.98,-831 R22.1
RXD: U3.5 U6.1 | length 1530.1
  Top Layer w8: v1(247,-636) 226,-657 170,-657 152,-639 152,-473 193.2,-431.8 193.2,-409.33 217.86,-384.66 454.34,-384.66 479,-360 v1(510,-360)
  Bottom Layer w8: U3.5 237.79,-645.21 v1(247,-636) ; v1(510,-360) 527,-377 962,-377 975,-390 1125,-390 1150,-365 v1(1200,-365)
  Bottom Layer w15: v1(1200,-365) U6.1
S+: R2.2 S+.1 | length 248.1
  Bottom Layer w10: S+.1 400,-1015 410,-1005 410,-985 340,-915 R2.2
S-: R1.2 S-.1 | length 264.7
  Bottom Layer w10: R1.2 405,-955 465,-1015 604,-1015 S-.1
SCLK: U1.5 U3.2 | length 446.8
  Top Layer w8: v1(315,-760) 350,-795 v1(585,-795)
  Bottom Layer w8: U3.2 314.57,-759.57 v1(315,-760) ; U1.5 499.75,-838.75 541.25,-838.75 v1(585,-795)
SW1: C15.1 R12.2 U3.13 | length 1168.4
  Top Layer w8: v1(209,-559) 210.49,-560.49 210.49,-572.62 221.34,-583.47 239.72,-583.47 279,-622.75 279,-685 299.85,-705.85 778.85,-705.85 867,-794 958,-794 986.55,-822.55 v1(986.55,-863.82)
  Bottom Layer w8: U3.13 161.02,-545.02 175,-559 v1(209,-559)
  Bottom Layer w10: R12.2 C15.1
SW2: C16.1 R13.2 U3.4 | length 163
  Bottom Layer w8: v1(240,-760) 262.18,-737.82 262.18,-704.24 U3.4
  Bottom Layer w10: R13.2 240,-794.02 C16.1 240,-785.98 v1(240,-760)
SW3: C14.1 R22.2 U3.14 | length 1279.6
  Top Layer w8: v1(77,-454) 78.06,-455.06 78.06,-468.06 119,-509 119,-612 v1(93,-638)
  Top Layer w10: v1(88,-742) 148,-802 218.54,-802 219.04,-802.5 309.5,-802.5 325,-818 620,-818 624.9,-822.9 644.92,-822.9 R22.2 653.14,-830.87 653.14,-806.86 662,-798 695,-798 709.86,-783.14 709.86,-765.13 C14.1
  Bottom Layer w8: v1(77,-454) 76,-453 76,-406 91,-391 171,-391 186.61,-406.61 U3.14 ; v1(88,-742) 88,-709 93,-704 v1(93,-638)
SWCLK: P6.2 U3.18 | length 363
  Bottom Layer w8: P6.2 58.69,-630 95.69,-593 259.38,-593 288.98,-563.4 U3.18
TXD: U3.6 U6.4 | length 1457.4
  Top Layer w8: v1(212.2,-636.8) 211.44,-636.04 211.44,-622.44 177,-588 177,-511 243,-445 v1(510,-445)
  Bottom Layer w8: U3.6 v1(212.2,-636.8) ; v1(510,-445) 552,-403 937,-403 963,-429 963,-518 985,-540
  Bottom Layer w10: 985,-540 1140,-540 1176.29,-503.71 1191.29,-503.71 v1(1195,-500) 1210,-515 U6.4
VCC_5V: C1.1 C3.1 C11.1 C18.1 D2.2 P6.1 R10.1 R11.1 R21.1 U1.7 U2.3 U3.9 U6.8 U7.10 U7.16 | length 3576.6
  Top Layer w8: v1(570,-740) 598,-740 619.15,-718.85 765.85,-718.85 777,-730 777,-754.02 R21.1
  Top Layer w15: P6.1 110,-680 119,-671 ; v2(242.53,-360) 199,-360 174,-385 174,-423 135.5,-461.5 135.5,-654.5 119,-671 ; v2(395,-335) 397.5,-337.5 519.32,-337.5 526.82,-345 527,-345 535,-353 535,-430 v1(550,-445) ; v1(570,-740) 568.65,-740 560.65,-732 275,-732 244.5,-701.5 149.5,-701.5 119,-671 ; v1(955,-265) 981,-291 981,-484 954,-511 v1(954,-547) 955.35,-547 960.39,-552.03 v1(1220.98,-552.03)
  Bottom Layer w10: 103,-769.02 103,-828 129.02,-854.02 R11.1 ; v1(550,-445) 574,-421 801.39,-421 823.39,-443
  Bottom Layer w15: P6.1 45,-685 C3.1 98.79,-769.02 ; 103,-769.02 98.79,-769.02 ; U3.9 135.43,-732.38 98.79,-769.02 ; U1.7 v1(570,-740) ; v1(550,-445) 550,-446.29 560,-456.29 U7.16 ; 823.39,-443 868.79,-443 ; U7.10 860,-451.79 868.79,-443 ; v1(954,-547) 944,-537 944,-453 934,-443 868.79,-443 ; v1(1220.98,-552.03) 1241.56,-572.61 1241.56,-592.5 1249.06,-600 R10.1
  Bottom Layer w30: U2.3 300.45,-358.72 D2.2 311.65,-369.92 375.15,-369.92 380.23,-375 C18.1 395.55,-375 v2@395.55,-335 ; v1(955,-265) 1000,-265 C11.1 1000,-315 1017.57,-332.57 1017.57,-362.5 1020.07,-365 U6.8
VCC_INV: C12.1 D1.1 VCC.1 | length 172.8
  Bottom Layer w30: C12.1 297.83,-148.39 D1.1 VCC.1
VCC_REF: C2.1 C4.1 C10.1 U1.1 U1.8 U4.5 V+.1 | length 910.2
  Top Layer w10: v1(836,-736) 894,-736 925,-705 V+.1
  Bottom Layer w10: C4.1 430.98,-699.02 440,-690 U1.8 540,-690 565,-715 645,-715 668.63,-691.37 710.13,-691.37 U1.1 713.87,-692.37 752.37,-692.37 774.02,-714.02 C2.1 800,-714.14 810,-724.14 824.14,-724.14 v1(836,-736) 839.83,-732.17 851.84,-732.17 855,-729.02 860,-729.02 867.02,-722 867.02,-717 C10.1 ; C10.1@870,-717.6 U4.5
pads on no net: C1.0 C2.0 C3.0 C4.0 C5.0 C6.0 C7.0 C8.0 C9.0 C10.0 C11.0 C12.0 C13.0 C14.0 C15.0 C16.0 C17.0 C18.0 R1.0 R2.0 R3.0 R4.0 R5.0 R6.0 R7.0 R8.0 R9.0 R10.0 R11.0 R12.0 R13.0 R14.0 R15.0 R16.0 R17.0 R18.0 R19.0 R20.0 R21.0 R22.0 U7.9

## Polygon pours and split planes (outlines as drawn)
GND on Top Layer "GND_L01_P000" (solid, remove dead copper, pour order 0): -98,113 -87,102 1394,102 1394,-1050 1302,-1142 1297,-1137 -81,-1137 -81,102
GND on Bottom Layer "GND_L02_P002" (solid, remove dead copper, pour order 2): -98,113 -87,102 1394,102 1394,-1050 1302,-1142 1297,-1137 -81,-1137 -81,102

## Keep-outs
Keep-Out Layer:
  lines w5: -0.36,-870.01 -0.36,-180.01 ; -0.36,-866.15 ccw(c196.49,-866.15) 196.49,-1063 ; -0.36,-196.86 cw(c196.49,-196.86) 196.49,-0.01 ; 179.64,-0.01 1104.64,-0.01 ; 192.63,-1063 1102,-1063 ccw(c1102,-866.15) 1298.85,-866.15 ; 1102,-0.01 cw(c1102,-196.86) 1298.85,-196.86 ; 1298.85,-880.8 1298.85,-194.22

## Silkscreen, mask and mechanical layers (free items; w line width, h text height)
Top Overlay:
  text "Sensor V1.1" at 157,-731 h30
Mechanical 1:
  lines w5: 0,-870 0,-180 ; 0,-866.14 ccw(c196.85,-866.14) 196.85,-1062.99 ; 0,-196.85 cw(c196.85,-196.85) 196.85,0 ; 180,0 1105,0 ; 192.99,-1062.99 1102.36,-1062.99 ccw(c1102.36,-866.14) 1299.21,-866.14 ; 1102.36,0 cw(c1102.36,-196.85) 1299.21,-196.85 ; 1299.21,-880.79 1299.21,-194.21